# Altium PCB PCB1.PcbDoc
Units mm, origin at the board's own origin, x right, y up, seen from the top; angles counter-clockwise.
Board outline 45 x 65 mm, 2 copper layers (Top Layer, Bottom Layer); 70 components, 45 nets, 312 pads, 142 vias.
Unrouted connection lines stored in the file: 23.
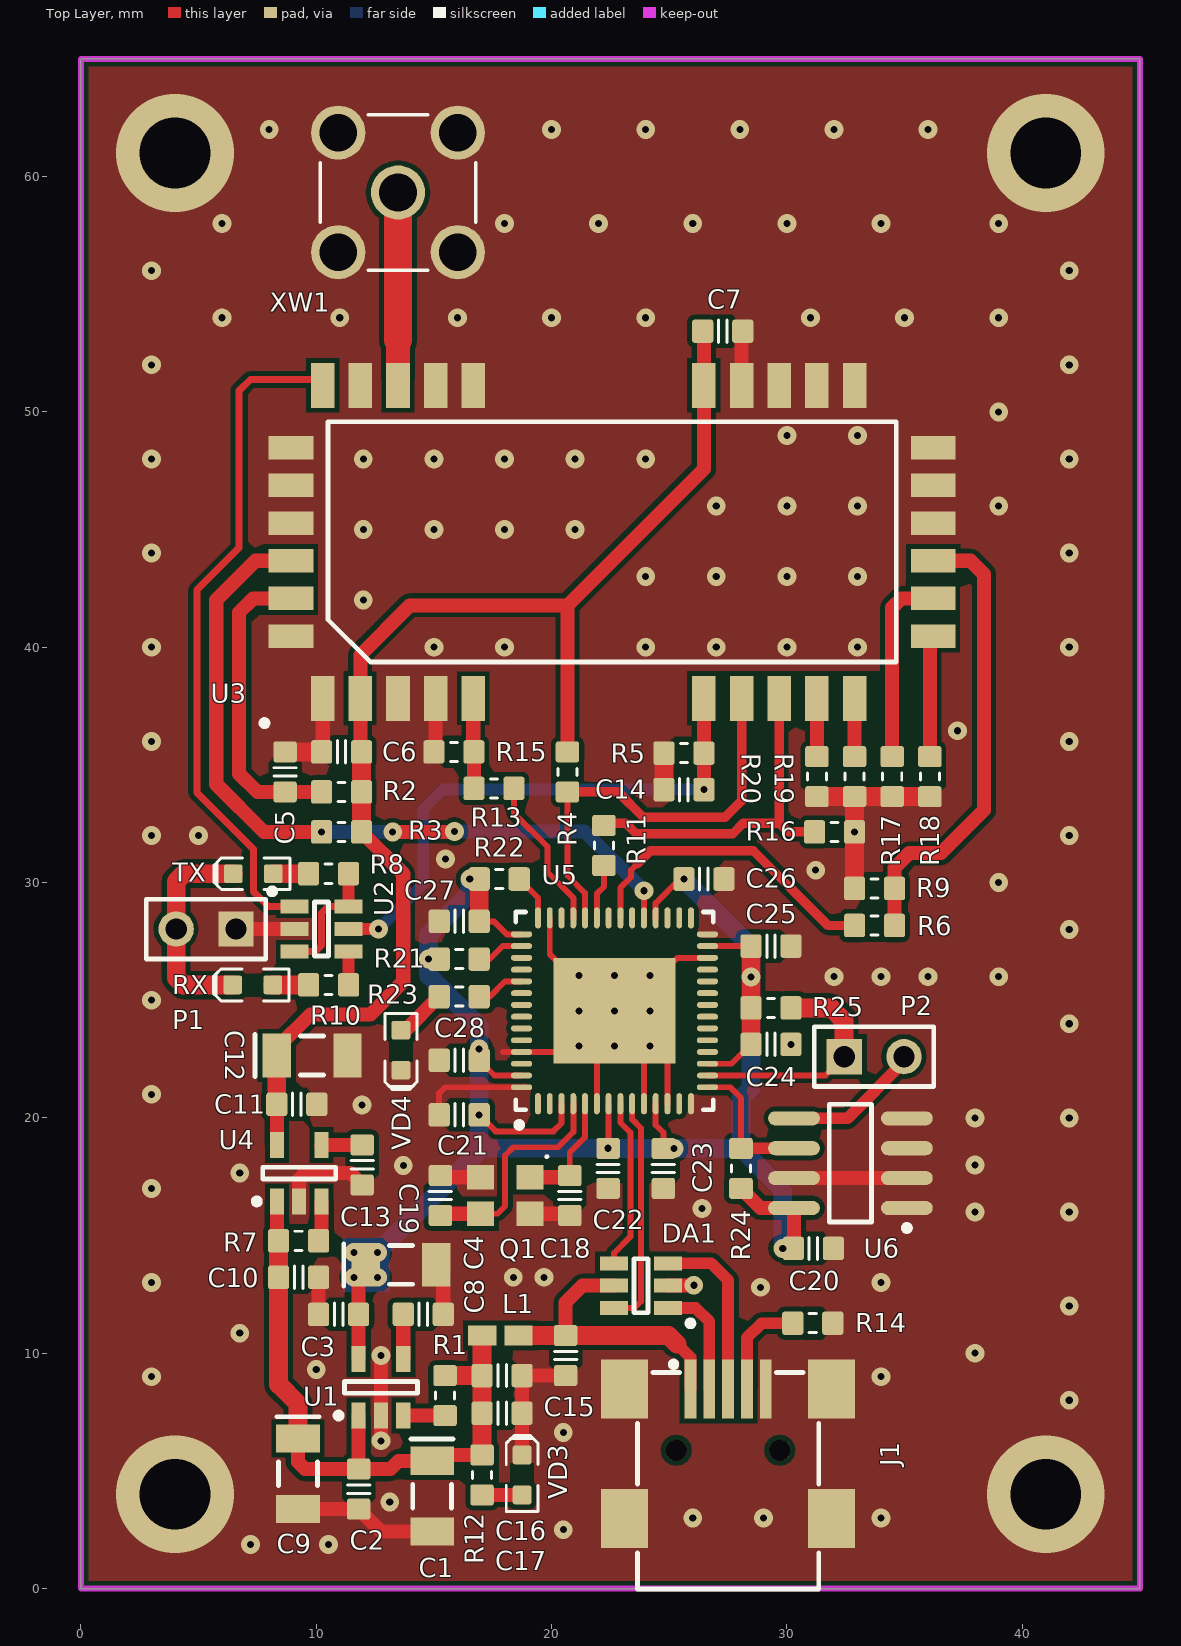
[diagram p0: Top Layer view]
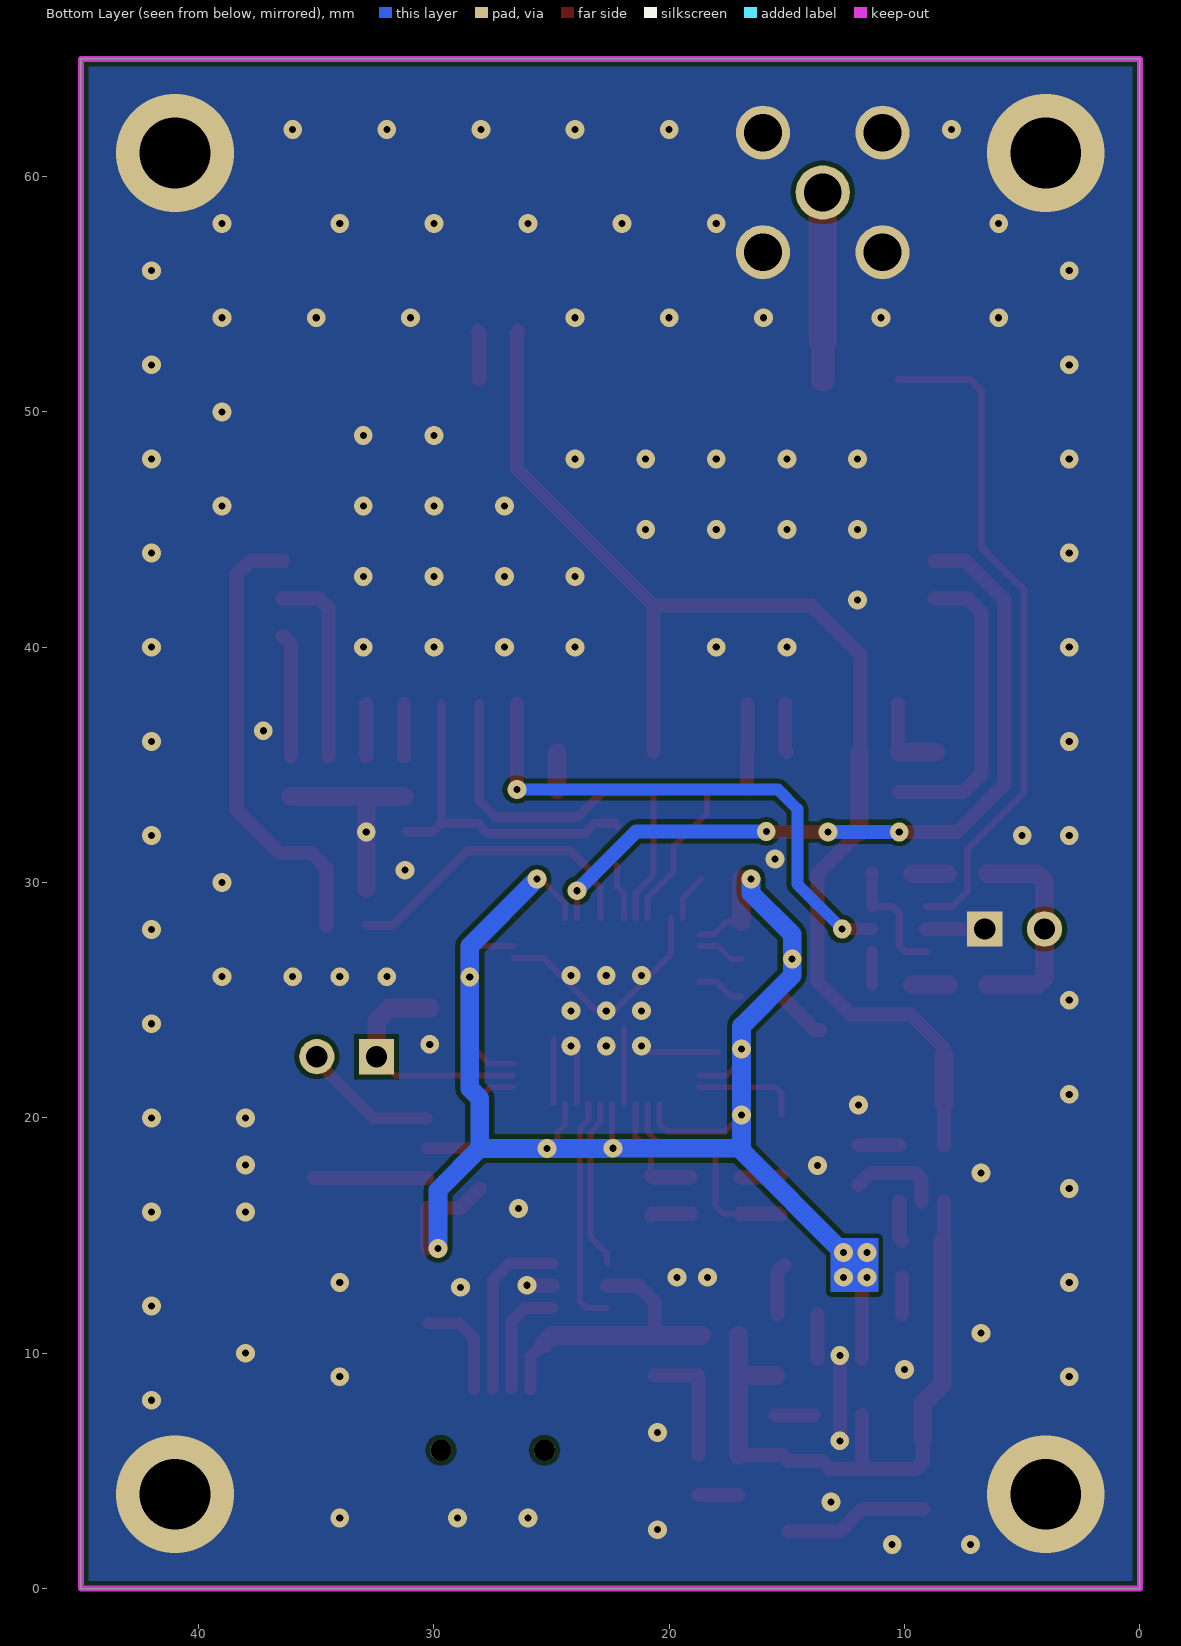
[diagram p1: Bottom Layer view, seen from below]

## Layer stack, top to bottom
Top Solder: solder mask 0.0102, Solder Resist, Dk 3.5
Top Layer: signal copper 0.0356
Dielectric 1: dielectric 0.32, FR-4, Dk 4.8
Bottom Layer: signal copper 0.0356
Bottom Solder: solder mask 0.0102, Solder Resist, Dk 3.5

## Board outline
0,0 45,0 45,65 0,65

## Design rules (kind name [scope] priority, off if disabled: settings)
Clearance [All] p1: gap=0.2 ignorepadtopadclearanceinfootprint=FALSE except(0: Arc-Hole Track-Hole SMDPad-Hole THPad-Hole Via-Hole Fill-Hole Poly-Hole Region-Hole Text-Hole)
PlaneConnect [All] p1: planeconnectstyle=Direct reliefexpansion=0.508 reliefentries=4 reliefconductorwidth=0.254 reliefairgap=0.254
PolygonConnect [All] p1: connectstyle=Direct reliefconductorwidth=0.254 reliefentries=4 polygonreliefangle="90 Angle" airgapwidth=0.254
RoutingVias [All] p1: holewidth=0.3 width=0.8 viastyle="Through Hole" minholewidth=0.3 minwidth=0.8 maxholewidth=10 maxwidth=12
SolderMaskExpansion [All] p1: expansion=0.102
Width [All] p1: maxlimit=3 minlimit=0.2 preferedwidth=0.5
29 further rules are at their usual default settings.

## Components (designator, comment, footprint, x,y, rotation, side; value= is the part's Value field where it differs from the comment)
C1 "10uF" CC3216(1206)x18 14.925,3.925 r270 top
C2 "0.1uF" CAP(0603) 11.8,4.225 r90 top
C3 "0.1uF" CAP(0603) 10.95,11.65 r0 top
C4 "22uF" CC3216(1206)x18 13.6,13.75 r0 top
C5 "1nF" CAP(0603) 8.675,34.7 r270 top
C6 "0.1uF" CAP(0603) 11.075,35.55 r0 top
C7 "0.1uF" CAP(0603) 27.275,53.425 r180 top
C8 "0.1uF" CAP(0603) 14.55,11.65 r180 top
C9 "10uF" CC3216(1206)x18 9.225,4.875 r270 top
C10 "0.1uF" CAP(0603) 9.25,13.225 r180 top
C11 "0.1uF" CAP(0603) 9.175,20.575 r180 top
C12 "22uF" CC3216(1206)x18 9.825,22.65 r0 top
C13 "0.1uF" CAP(0603) 11.95,18 r90 top
C14 "0.47uF" CAP(0603) 25.625,33.95 r180 top
C15 "0.01uF" CAP(0603) 20.6,9.9 r90 top
C16 "0.1uF" CAP(0603) 17.9,9.05 r180 top
C17 "4.7uF" CAP(0603) 17.9,7.45 r180 top
C18 "12pF" CAP(0603) 20.775,16.7 r90 top
C19 "12pF" CAP(0603) 15.275,16.7 r270 top
C20 "0.1uf" CAP(0603) 31.125,14.45 r180 top
C21 "0.1uF" CAP(0603) 16.075,20.125 r0 top
C22 "0.1uF" CAP(0603) 22.4,17.85 r90 top
C23 "0.1uF" CAP(0603) 24.75,17.85 r90 top
C24 "0.1uF" CAP(0603) 29.325,23.125 r180 top
C25 "0.1uF" CAP(0603) 29.325,27.3 r180 top
C26 "0.1uF" CAP(0603) 26.475,30.15 r180 top
C27 "0.1uF" CAP(0603) 16.075,28.35 r0 top
C28 "0.1uF" CAP(0603) 16.075,22.45 r0 top
DA1 "usblc6-2sc6" SOT23-6L 23.8,12.869 r180 top
J1 "USB 2.0 mini" 65100516121 27.5,4.6 r0 top
L1 "BLM18EG221SN1" BLM18EG221SN1 17.825,10.75 r180 top
P1 "Header 2" HDR1X2 6.59,28.025 r180 top
P2 "Header 2" HDR1X2 32.435,22.6 r0 top
Q1 "Crystal 24MHz" SMD3225 18.025,16.7 r180 top
R1 "10K" RES(0603) 15.475,8.2 r270 top
R2 "15K" RES(0603) 11.075,33.85 r0 top
R3 "100K" RES(0603) 11.075,32.15 r0 top
R4 "1K" RES(0603) 20.675,34.7 r90 top
R5 "100K" RES(0603) 25.625,35.5 r180 top
R6 "11K" RES(0603) 33.725,28.175 r0 top
R7 "10K" RES(0603) 9.25,14.775 r0 top
R8 "4.7K" RES(0603) 10.525,30.375 r180 top
R9 "36K" RES(0603) 33.725,29.75 r0 top
R10 "4.7K" RES(0603) 10.525,25.65 r180 top
R11 "1.1K" RES(0603) 22.225,31.575 r90 top
R12 "4.7K" RES(0603) 17.05,4.825 r90 top
R13 "1.1K" RES(0603) 17.55,34 r180 top
R14 "100K" RES(0603) 31.1,11.275 r180 top
R15 "3.6K" RES(0603) 15.85,35.55 r0 top
R16 "3.6K" RES(0603) 32.025,32.15 r180 top
R17 "100K" RES(0603) 34.475,34.5 r90 top
R18 "100K" RES(0603) 36.075,34.5 r90 top
R19 "100K" RES(0603) 32.875,34.5 r90 top
R20 "100K" RES(0603) 31.275,34.5 r90 top
R21 "10K" RES(0603) 16.075,26.75 r0 top
R22 "10K" RES(0603) 17.775,30.15 r180 top
R23 "4.7K" RES(0603) 16.075,25.15 r180 top
R24 "4.7K" RES(0603) 28.05,17.85 r270 top
R25 "4.7K" RES(0603) 29.325,24.675 r180 top
RX "VD_6" LED_0603 7.3,25.65 r180 top (schematic designator VD2)
TX "VD_6" LED_0603 7.325,30.375 r180 top (schematic designator VD1)
U1 "TPS73633DBVT" TI-DBV5_N 12.75,8.55 r90 top
U2 "SN74LVC2G04" SOT23-6L 10.225,28.025 r0 top
U3 "nanoPAN 5375" nanoPAN_fp 10.275,37.825 r0 top
U4 "TPS73625DBVT" TI-DBV5_N 9.275,17.65 r90 top
U5 "CY7C68013A-56LTXC" CYP-LTX56-5200X4500TP_N 22.675,24.55 r90 top
U6 "AT24C128" 8S1_N 32.7,18.075 r180 top
VD3 "VD_6" LED_0603 18.75,4.825 r90 top
VD4 "VD_6" LED_0603 13.6,22.875 r270 top
XW1 "XW_1" SMA-SV 13.475,59.325 r0 top

## Footprints (in the part's own frame and the unit in brackets; to place one, negate y for a bottom-side part, rotate by r counter-clockwise, add the part's x,y. Pads: shape width x height; smd on the part's side, far side on the other; paste and mask are expansions set on the pad)
8S1_N [mm] "SOIC, 8-Leads, Body 4.9x3.9mm, Pitch 1.27mm, IPC Medium Density"
  oval 2.2x0.6 smd: 1(-2.4,1.905) 2(-2.4,0.635) 3(-2.4,-0.635) 4(-2.4,-1.905) 5(2.4,-1.905) 6(2.4,-0.635) 7(2.4,0.635) 8(2.4,1.905)
  silkscreen extent -2.53,-2.5 0.9,2.88, body extent -3.1,-2.5 3.1,2.5, height 1.75
65100516121 [mm] "Mini USB 2.0 Type B SMT Horizontal 5 Contacts"
  rect 0.5x2.5 smd: 1(-1.6,3.875) 2(-0.8,3.875) 3(0,3.875) 4(0.8,3.875) 5(1.6,3.875)
  rect 2x2.5 smd: Shell(-4.4,-1.625) Shell(-4.4,3.875) Shell(4.4,-1.625) Shell(4.4,3.875)
  round 0.9 hole 0.9 unplated: ""(-2.2,1.275) ""(2.2,1.275)
  silkscreen extent -3.85,-4.62 3.85,5.04, body extent -4.8,-4.63 4.8,4.62, height 3.92
BLM18EG221SN1 [mm] "Molded Inductor, 2-Leads, Body 1,60x0,80mm, IPC Medium Density"
  rect 1.2x0.85 smd: 1(-0.775,0) 2(0.775,0)
  body extent -0.8,-0.4 0.8,0.4, height 0.8
CAP(0603) [mm]
  round 0.254 on Mech15: 0(0,0)
  rrect25% 0.9x1 smd: 1(-0.85,0) 2(0.85,0)
  Top Layer pour cut-out: -0.6,0.5 -0.4,0.7 0.4,0.7 0.6,0.5 0.6,-0.5 0.4,-0.7 -0.4,-0.7 -0.6,-0.5
  silkscreen extent -0.18,-0.48 0.18,0.48, body extent -0.9,-0.45 0.9,0.45, height 0.5
CC3216(1206)x18 [mm]
  rect 1.2x1.85 smd: 1(-1.5,0) 2(1.5,0)
  silkscreen extent -2.42,-0.9 0.5,0.9, body extent -1.7,-0.9 1.7,0.9, height 1.6
CYP-LTX56-5200X4500TP_N [mm] "QFN, 56-Leads, Body 8.1x8.1mm, Pitch 0.5mm, Thermal Pad 5.2x4.5mm, IPC Medium Density"
  oval 0.9x0.25 smd: 1(-3.95,3.25) 2(-3.95,2.75) 3(-3.95,2.25) 4(-3.95,1.75) 5(-3.95,1.25) 6(-3.95,0.75) 7(-3.95,0.25) 8(-3.95,-0.25) 9(-3.95,-0.75) 10(-3.95,-1.25) 11(-3.95,-1.75) 12(-3.95,-2.25) 13(-3.95,-2.75) 14(-3.95,-3.25) 29(3.95,-3.25) 30(3.95,-2.75) 31(3.95,-2.25) 32(3.95,-1.75) 33(3.95,-1.25) 34(3.95,-0.75) 35(3.95,-0.25) 36(3.95,0.25) 37(3.95,0.75) 38(3.95,1.25) 39(3.95,1.75) 40(3.95,2.25) 41(3.95,2.75) 42(3.95,3.25)
  oval 0.25x0.9 smd: 15(-3.25,-3.95) 16(-2.75,-3.95) 17(-2.25,-3.95) 18(-1.75,-3.95) 19(-1.25,-3.95) 20(-0.75,-3.95) 21(-0.25,-3.95) 22(0.25,-3.95) 23(0.75,-3.95) 24(1.25,-3.95) 25(1.75,-3.95) 26(2.25,-3.95) 27(2.75,-3.95) 28(3.25,-3.95) 43(3.25,3.95) 44(2.75,3.95) 45(2.25,3.95) 46(1.75,3.95) 47(1.25,3.95) 48(0.75,3.95) 49(0.25,3.95) 50(-0.25,3.95) 51(-0.75,3.95) 52(-1.25,3.95) 53(-1.75,3.95) 54(-2.25,3.95) 55(-2.75,3.95) 56(-3.25,3.95)
  rect 4.5x5.2 smd: 57(0,0)
  silkscreen extent -4.97,-4.2 4.2,4.2, body extent -4,-4 4,4, height 0.95
HDR1X2 [mm] "Connector; Header; 2 Position"
  rect 1.5x1.5 hole 0.9: 1(0,0)
  round 1.5 hole 0.9: 2(2.54,0)
  silkscreen extent -1.27,-1.27 3.81,1.27
LED_0603 [mm] "Molded Diode, 2-Leads, Body 1,60x0,80mm, IPC Medium Density"
  round 0.254 on Mech15: 0(0,0)
  rrect25% 0.8x0.8 smd: A(-0.85,0) K(0.85,0)
  Top Layer pour cut-out: -0.5,0.5 0.5,0.5 0.5,-0.5 -0.5,-0.5
  silkscreen extent -1.55,-0.67 1.68,0.67, body extent -0.8,-0.4 0.8,0.4, height 0.75
nanoPAN_fp [mm]
  rect 1x1.9 smd: 1(0,0) 2(1.6,0) 3(3.2,0) 4(4.8,0) 5(6.4,0) 6(16.2,0) 7(17.8,0) 8(19.4,0) 9(21,0) 10(22.6,0) 17(22.6,13.3) 18(21,13.3) 19(19.4,13.3) 20(17.8,13.3) 21(16.2,13.3) 22(6.4,13.3) 23(4.8,13.3) 24(3.2,13.3) 25(1.6,13.3) 26(0,13.3)
  rect 1.9x1 smd: 11(25.95,2.65) 12(25.95,4.25) 13(25.95,5.85) 14(25.95,7.45) 15(25.95,9.05) 16(25.95,10.65) 27(-1.35,10.65) 28(-1.35,9.05) 29(-1.35,7.45) 30(-1.35,5.85) 31(-1.35,4.25) 32(-1.35,2.65)
  silkscreen extent -2.6,-1.17 24.38,11.75, body extent -2.22,-0.85 26.82,14.15, height 3
RES(0603) [mm] "Res 0603"
  round 0.254 on Mech15: 0(0,0)
  rrect25% 0.9x1 smd: 1(-0.85,0) 2(0.85,0)
  Top Layer pour cut-out: -0.6,0.5 -0.4,0.7 0.4,0.7 0.6,0.5 0.6,-0.5 0.4,-0.7 -0.4,-0.7 -0.6,-0.5
  silkscreen extent -0.15,-0.41 0.15,0.41, body extent -0.9,-0.47 0.9,0.48, height 0.5
SMA-SV [mm]
  round 2.3 hole 1.6: 1(0,0) 2(-2.54,-2.54) 2(-2.54,2.54) 2(2.54,-2.54) 2(2.54,2.54)
  silkscreen extent -3.3,-3.3 3.3,3.3, body extent -3.17,-3.17 3.17,3.17, height 9.5
SMD3225 [mm] "DFN, 4-Leads, Body 2,50x3,20mm, Pitch 2,10mm, IPC Medium Density"
  rect 1.15x1.05 smd: 1(-1.05,-0.775) 2(1.05,-0.775) 3(1.05,0.775) 4(-1.05,0.775)
  silkscreen extent -1.83,-1.7 -1.73,-1.6, body extent -1.6,-1.25 1.6,1.25, height 0.61
SOT23-6L [mm] "SOT23-6L"
  rect 1.2x0.6 smd: 1(-1.15,0.95) 2(-1.15,0) 3(-1.15,-0.95) 4(1.15,-0.95) 5(1.15,0) 6(1.15,0.95)
  silkscreen extent -2.23,-1.15 0.3,1.72, body extent -1.51,-1.53 1.49,1.52, height 1.4
TI-DBV5_N [mm] "SOT23, 5-Leads, Body 2.9x1.6mm, Pitch 0.95mm, IPC Medium Density"
  rect 1.1x0.6 smd: 1(-1.2,0.95) 2(-1.2,0) 3(-1.2,-0.95) 4(1.2,-0.95) 5(1.2,0.95)
  silkscreen extent -1.32,-1.55 0.25,1.92, body extent -0.87,-1.52 0.87,1.53, height 1.45

## Part data
C1 C4 C9 C12: library part Tantalum, "Tantalum SMD capacitor"
C2 C3 C5 C6 C7 C8 C10 C11 C13 C14 C15 C16 C17 C18 C19 C20 C21 C22 C23 C24 C25 C26 C27 C28: library part CAP
J1: "Mini USB 2.0 Type B SMT Horizontal 5 Contacts WR-COM"
L1: "SMD Ferrite Bead 2A 220 Ohm(100MHz)", Current="2 A", DC Resistance="0.05 Ohm", Impedance="220 Ohm (100MHz) / 260 Ohm (1GHz)", Name="Чип-феррит BLM18EG221SN1", Ta=-55+125, Type=Inductor, Vendor1="Murata Manufacturing, Co., Japan", Vendor1Name=BLM18EG221SN1
P1 P2: "Header, 2-Pin", LatestRevisionDate=17-Jul-2002, LatestRevisionNote="Re-released for DXP Platform.", Publisher="Altium Limited"
R1 R2 R3 R4 R5 R6 R7 R8 R9 R10 R11 R12 R13 R14 R15 R16 R17 R18 R19 R20 R21 R22 R23 R24 R25: library part RES, "Chip Resistor"
U1: "Single Output Low Noise LDO, 400 mA, Fixed 3.3 V Output, 1.7 to 5.5 V Input, with Reverse Current Protection, 5-pin SOT-23 (DBV), -40 to 85 degC, Green (RoHS & no Sb/Br)", Manufacturer="Texas Instruments", Rating=Catalog, Accuracy(%)=1, Code_JEDEC=MO-178, DatasheetVersion=SBVS038T, Eco-Plan="Green (RoHS & no Sb/Br)", Fixed Output Options(V)=3.3, Iout(Max)(A)=0.4, Iq(Typ)(mA)=0.3, Mounting Technology="Surface Mount", PackageDescription="5-Pin Plastic Small Outline, Body 1.60 × 2.90 mm, Pitch 0.95 mm", PackageReference=DBV5, PackageVersion=4073253-4/K, PartNumber=TPS73633DBVT, SubFamily="Single Channel LDO", Vdo(Typ)(mV)=75, Vin(Max)(V)=5.5, Vin(Min)(V)=1.7, Vout Adj(Max)(V)=3.3, Vout Adj(Min)(V)=3.3
U2: library part SN74LVC2G04DBVR
U3: library part nanoPAN
U4: "Single Output Low Noise LDO, 400 mA, Fixed 2.5 V Output, 1.7 to 5.5 V Input, with Reverse Current Protection, 5-pin SOT-23 (DBV), -40 to 85 degC, Green (RoHS & no Sb/Br)", Manufacturer="Texas Instruments", Rating=Catalog, Accuracy(%)=1, Code_JEDEC=MO-178, DatasheetVersion=SBVS038T, Eco-Plan="Green (RoHS & no Sb/Br)", Fixed Output Options(V)=2.5, Iout(Max)(A)=0.4, Iq(Typ)(mA)=0.3, Mounting Technology="Surface Mount", PackageDescription="5-Pin Plastic Small Outline, Body 1.60 × 2.90 mm, Pitch 0.95 mm", PackageReference=DBV5, PackageVersion=4073253-4/K, PartNumber=TPS73625DBVT, SubFamily="Single Channel LDO", Vdo(Typ)(mV)=75, Vin(Max)(V)=5.5, Vin(Min)(V)=1.7, Vout Adj(Max)(V)=2.5, Vout Adj(Min)(V)=2.5
U5: "EZ-USB(R) FX2LP(TM) USB Microcontroller High-Speed USB Peripheral Controller, 16 KB, 24 I/Os, 3 to 3.6 V, 0 to 70 degC, 56-Pin QFN (LTX56), Tray"

## Via types
v1: diameter 0.8, hole 0.3, Top Layer to Bottom Layer, tented both sides, 113 vias
v2: diameter 0.8, hole 0.3, Top Layer to Bottom Layer, tented bottom, 25 vias
v3: diameter 5, hole 3, Top Layer to Bottom Layer, 4 vias

## Nets (pads, with @x,y where several pads share a name; then routed paths per layer and width w, separated by ;. In a path a pad name is that pad's centre, name@x,y a point inside that pad or via, vN(x,y) a via of type N, cw(c..) or ccw(c..) an arc to the next point about the centre after c; other vN are vias at no path point)
2V5: C6.2 C7.2 C11.2 C12.1 R2.2 R3.2 R4.2 U3.2 U3.21 U4.5 | length 55.3
  Top Layer w0.6: U4.5 C11.2 ; C12.1 8.325,22.975 9.75,24.4 12.3,24.4 13.7,25.8 13.7,30.375 R3.2 ; C6.2@11.9,35.55 11.875,35.575 11.875,37.575 11.875,39.675 13.975,41.775 20.675,41.775 ; R4.2 20.675,41.775 ; C7.2 26.475,53.375 26.475,51.375 26.475,47.575 20.675,41.775
  Top Layer w0.8: C11.2 C12.1 ; R3.2 R2.2 C6.2
3V3: C3.2 C4.1 C20.2 C21.2 C22.2 C23.2 C24.2 C25.2 C26.2 C27.2 C28.2 R21.1 R22.2 R24.2 R25.2 U1.5 U5.3 U5.7 U5.11 U5.17 U5.27 U5.32 U5.43 U5.55 U6.8 | length 81.8
  Top Layer w0.25: v2(16.925,20.125) 17.625,19.425 20.075,19.425 20.425,19.775 U5.3 ; C28.2 17.575,21.8 U5.55 ; C27.2 17.55,28.35 18.1,27.8 U5.43 ; C22.2 22.425,18.725 U5.7 ; U5.11 24.425,19.7 24.75,19.375 C23.2 ; U5.32 24.425,29.125 25.45,30.15 v2(25.625,30.15) ; U5.17 27.65,22.3 C24.2 ; U5.27 C25.2
  Top Layer w0.6: U1.5 C3.2 11.8,13.45 C4.1 ; R24.2 28.88,16.17 U6.8 30.3,14.475 C20.2
  Top Layer w0.8: C27.2 R22.2 ; C24.2 R25.2 v1(28.475,25.987) C25.2
  Bottom Layer w0.8: v2(12.6,14.275) 16.925,18.6 ; v2(16.525,30.15) 16.525,29.55 14.775,27.8 v2(14.775,26.75) 14.775,26.05 16.925,23.9 v2(16.925,22.925) v2(16.925,20.125) 16.925,18.6 ; v2(25.625,30.15) 28.475,27.3 v1(28.475,25.987) 28.475,21.25 28.05,20.825 28.05,18.7 ; v2(29.825,14.45) 29.825,16.925 28.05,18.7 ; 16.925,18.6 17.032,18.707 v2(22.392,18.707) 22.4,18.7 v2(25.2,18.7) 28.05,18.7
  other v2: 11.6,13.225 12.6,13.225 11.6,14.275
5V: C1.1 C2.2 C9.1 C10.2 C16.2 C17.2 L1.2 R1.1 R7.1 R12.2 U1.1 U4.1 | length 28.6
  Top Layer w0.6: U4.1 8.325,14.85 R7.1 ; C9.1 9.225,5.375 9.525,5.075 C2.2 ; U1.1 C2.2 ; R12.2 15.175,5.675 C1.1 13.5,5.425 13.15,5.075 C2.2
  Top Layer w0.8: R7.1 C10.2 8.4,8.675 9.225,7.85 C9.1 ; R1.1 C16.2 ; R12.2 C17.2 C16.2 ; L1.2 C16.2
/PONRESET: R6.1 U5.35 | length 13.4
  Top Layer w0.25: U5.35 22.925,29.775 23.375,30.225 23.375,30.525 23.65,30.8
  Top Layer w0.4: 23.65,30.8 24.2,31.35 28.575,31.35 31.75,28.175 R6.1
ANT: U3.24 XW1.1 | length 8
  Top Layer w1: U3.24@13.475,51.375 13.475,53.05
  Top Layer w1.2: 13.475,53.05 XW1.1
AT_SCL: R24.1 U5.15 U6.6 | length 6
  Top Layer w0.25: U5.15 27.6,21.3 28.05,20.85 R24.1
  Top Layer w0.5: R24.1 28.06,18.71 U6.6
AT_SDA: P2.1 R25.1 U5.16 | length 10.1
  Top Layer w0.25: U5.16 31.635,21.8 P2.1
  Top Layer w0.8: R25.1 31.875,24.675 32.425,24.125 32.425,22.61 P2.1
D+_P: DA1.3 J1.3 | length 7.5
  Top Layer w0.5: DA1.3 26.781,13.819 27.5,13.1 J1.3
D-_N: DA1.1 J1.2 | length 4.9
  Top Layer w0.5: DA1.1 26.131,11.919 26.7,11.35 J1.2
DMINUS: DA1.6 U5.9 | length 9.8
  Top Layer w0.25: DA1.6 23.522,11.919 23.8,12.197 23.8,14.248 23.8,19.561 23.425,19.936 U5.9
DPLUS: DA1.4 U5.8 | length 7.2
  Top Layer w0.25: DA1.4 22.65,14.25 23.35,14.95 23.35,19.375 22.925,19.8 U5.8
GND: C1.2 C2.1 C3.1 C4.2 C5.1 C6.1 C7.1 C8.1 C9.2 C10.1 C11.1 C12.2 C13.1 C14.2 C15.1 C16.1 C17.1 C18.1 C19.1 C20.1 C21.1 C22.1 C23.1 C24.1 C25.1 C26.1 C27.1 C28.1 DA1.2 J1.5 J1.Shell P1.1 Q1.2 Q1.4 R5.2 R9.1 R14.1 R15.1 R16.1 R17.1 R18.1 R19.1 R20.1 U1.2 U2.2 U3.1 U3.3 U3.4 U3.14 U3.15 U3.16 U3.17 U3.18 U3.19 U3.20 U3.22 U3.23 U3.25 U3.27 U3.28 U3.29 U3.32 U4.2 U5.6 U5.10 U5.12 U5.14 U5.26 U5.28 U5.41 U5.53 U5.56 U5.57 U6.1 U6.2 U6.3 U6.4 U6.7 VD3.K VD4.K XW1.2 | length 78.1
  Top Layer w0.25: C21.1 15.225,21.05 15.475,21.3 U5.56 ; 17.925,22.8 U5.53 U5.57@20.925,22.8 ; U5.41 19.925,26.95 U5.57@22.325,24.55 ; U5.6 U5.57@21.925,23.8 ; U5.57@23.1,24.55 25.35,26.8 U5.26 ; U5.10 U5.57@23.925,23.3 ; U5.12 U5.57@24.925,23.375
  Top Layer w0.6: P1.1 U2.2 ; C9.2 C2.1 12.75,2.425 C1.2 ; U4.2 9.275,17.4 9.525,17.65 11.45,17.65 C13.1 ; C3.1 C10.1 ; C6.1@10.2,35.55 10.275,35.625 U3.1@10.275,37.575 ; v1(12.75,6.275) U1.2 ; U1.2 v1(12.75,9.9) ; R15.1 15.075,35.625 U3.4@15.075,37.575 ; C4.2 15.4,13.45 C8.1 ; C19.1 15.35,17.475 Q1.2 ; VD3.K C17.1 C16.1 C15.1 ; Q1.4 20.7,15.925 C18.1 ; DA1.2 26.027,12.869 v1(26.045,12.887) ; U3.20@28.075,51.375 28.075,53.375 C7.1 ; U6.7 U6.2
  Top Layer w0.8: C5.1 10.2,35.55 C6.1 ; C14.2 R5.2 ; R20.1 R19.1 ; R9.1 v2(32.875,32.15) R19.1 ; R18.1 R17.1 R19.1
  other v1: 7.2,1.875 10.525,1.875 20.5,2.5 26,3 29,3 34,3 13.125,3.675 20.5,6.625 42,8 3,9 34,9 10,9.3 38,10 6.75,10.85 42,12 28.875,12.8 3,13 34,13 18.375,13.225 19.675,13.225 38,16 42,16 26.4,16.15 3,17 6.75,17.65 13.7,17.975 38,18 38,20 42,20 11.95,20.55 3,21 42,24 3,25 32,26 34,26 36,26 39,26 42,28 39,30 31.225,30.525 15.5,31 3,32 5,32 42,32 3,36 42,36 37.25,36.45 3,40 15,40 18,40 24,40 27,40 30,40 33,40 42,40 12,42 24,43 27,43 30,43 33,43 3,44 42,44 12,45 15,45 18,45 21,45 27,46 30,46 33,46 39,46 3,48 12,48 15,48 18,48 21,48 24,48 42,48 30,49 33,49 39,50 3,52 42,52 6,54 11,54 16,54 20,54 24,54 31,54 35,54 39,54 3,56 42,56 6,58 18,58 22,58 26,58 30,58 34,58 39,58 8,62 20,62 24,62 28,62 32,62 36,62
  other v2: 21.175,23.05 22.675,23.05 24.175,23.05 30.175,23.125 21.175,24.55 22.675,24.55 24.175,24.55 21.175,26.05 22.675,26.05 24.175,26.05
  other v3: 4,4 41,4 4,61 41,61
LED_RX: R10.1 U2.4 | length 1.4
  Top Layer w0.5: R10.1 U2.4
LED_TX: R8.1 U2.3 U2.6 | length 5.3
  Top Layer w0.3: U2.3 9.975,27.075 10.225,27.325 10.225,28.7 10.5,28.975 U2.6
  Top Layer w0.5: U2.6 R8.1
NetC8_2: C8.2 U1.4 | length 1.9
  Top Layer w0.6: U1.4 C8.2
NetC13_2: C13.2 U4.4 | length 1.7
  Top Layer w0.6: U4.4 C13.2
NetJ1_4: J1.4 R14.2 | length 4.4
  Top Layer w0.5: J1.4 28.3,10.65 28.925,11.275 R14.2
NetP1_2: P1.2 RX.K TX.K | length 9.2
  Top Layer w0.8: RX.K 4.35,25.65 4.05,25.95 P1.2 4.05,30.05 4.375,30.375 TX.K
NetP2_2: P2.2 U6.5 | length 5.9
  Top Layer w0.5: U6.5 32.58,19.98 34.975,22.375 P2.2
NetR1_2: R1.2 U1.3 | length 1.6
  Top Layer w0.6: U1.3@13.85,7.35 R1.2
NetR6_2: R6.2 R9.2 U3.13 | length 19.5
  Top Layer w0.6: R6.2 R9.2 34.575,30.625 35.2,31.25 36.55,31.25 38.375,33.075 38.375,43.1 37.8,43.675 U3.13@36.425,43.675
NetR7_2: R7.2 U4.3 | length 1.7
  Top Layer w0.6: R7.2 10.225,14.9 U4.3
NetR8_2: R8.2 TX.A | length 1.5
  Top Layer w0.8: TX.A R8.2
NetR10_2: R10.2 RX.A | length 1.5
  Top Layer w0.8: RX.A R10.2
NetR11_2: R11.2 R16.2 U3.8 | length 14.6
  Top Layer w0.4: R11.2 22.325,32.525 23.15,32.525 23.6,32.075 27.7,32.075 28.15,32.525 29.675,32.525 ; U3.8@29.675,37.575 29.675,32.525 ; R16.2 30.05,32.15 29.675,32.525
NetR12_1: R12.1 VD3.A | length 1.7
  Top Layer w0.6: R12.1 VD3.A
NetR13_2: R13.2 R15.2 U3.5 | length 3.6
  Top Layer w0.6: U3.5@16.675,37.575 16.675,35.575 R15.2 R13.2
NetR17_2: R17.2 U3.12 | length 8.4
  Top Layer w0.6: R17.2 34.475,41.675 34.875,42.075 U3.12@36.425,42.075
NetR18_2: R18.2 U3.11 | length 5.3
  Top Layer w0.6: R18.2 36.075,40.125 U3.11@36.425,40.475
NetR19_2: R19.2 U3.10 | length 2.2
  Top Layer w0.6: R19.2 U3.10@32.875,37.575
NetR20_2: R20.2 U3.9 | length 2.2
  Top Layer w0.6: R20.2 U3.9@31.275,37.575
NetR21_2: R21.2 U5.44 | length 2
  Top Layer w0.25: R21.2 17.375,26.75 17.925,27.3 U5.44
NetR22_1: R22.1 U5.42 | length 2
  Top Layer w0.25: R22.1 19.425,29.35 U5.42
NetR23_1: R23.1 U5.47 | length 2.1
  Top Layer w0.25: R23.1 17.375,25.15 18.025,25.8 U5.47
NetR23_2: R23.2 VD4.A | length 2.2
  Top Layer w0.6: VD4.A 13.8,23.725 R23.2
QX1: C18.2 Q1.1 U5.5 | length 5.1
  Top Layer w0.25: C18.2 20.775,18.525 21.425,19.175 U5.5
  Top Layer w0.6: Q1.1 20.7,17.475 C18.2
QX2: C19.2 Q1.3 U5.4 | length 9.6
  Top Layer w0.25: Q1.3 17.7,15.925 18.025,16.25 18.025,18.4 18.375,18.75 20.275,18.75 20.925,19.4 U5.4
  Top Layer w0.6: C19.2 15.35,15.925 Q1.3
SPI_CLK: R13.1 U5.39 | length 6.5
  Top Layer w0.25: R13.1 18.4,32.95 19.825,31.525 19.825,30.45 20.925,29.35 U5.39
SPI_MISO: R4.1 U3.7 U5.38 | length 17.9
  Top Layer w0.25: R4.1 20.675,30.3 21.425,29.55 U5.38
  Top Layer w0.4: R4.1 22.825,33.85 23.9,32.775 27.375,32.775 28.075,33.475 U3.7@28.075,37.575
SPI_MOSI: R11.1 U5.37 | length 2.3
  Top Layer w0.25: U5.37 21.925,29.525 22.225,29.825 R11.1
TX_/RX: U2.1 U3.26 | length 28.8
  Top Layer w0.3: U2.1 7.975,28.975 7.325,29.625 7.325,31.425 4.925,33.825 4.925,42.425 6.725,44.225 6.725,50.9 7.2,51.375 U3.26@10.275,51.375
UCIRQ: R3.1 U3.30 U5.33 | length 32.7
  Top Layer w0.25: U5.33 v1(23.925,29.65)
  Top Layer w0.6: U3.30@8.725,43.675 7.425,43.675 5.75,42 5.75,34.175 7.775,32.15 v2(10.225,32.15) ; v1(13.25,32.15) 15.85,32.15 v1(15.875,32.175)
  Bottom Layer w0.6: v2(10.225,32.15) v1(13.25,32.15) ; v1(15.875,32.175) 21.4,32.175 v1(23.925,29.65)
UCRESET: C5.2 R2.1 U3.31 | length 12.9
  Top Layer w0.6: U3.31@8.725,42.075 7.325,42.075 6.725,41.475 6.725,34.625 7.5,33.85 C5.2 R2.1
UCVCC: C14.1 R5.1 U2.5 U3.6 | length 23.1
  Top Layer w0.5: U2.5 v1(12.65,28.025)
  Top Layer w0.6: v2(26.475,33.95) R5.1 U3.6@26.475,37.575
  Bottom Layer w0.5: v1(12.65,28.025) 14.55,29.925 14.55,33.125 15.375,33.95 v2(26.475,33.95)
Vbus: C15.2 DA1.5 J1.1 L1.1 | length 12.8
  Top Layer w0.5: L1.1@18.6,10.775 L1.1@18.625,10.75 ; 25.337,10.387 25.9,9.825 J1.1
  Top Layer w0.6: C15.2 20.6,12.15 21.319,12.869 DA1.5
  Top Layer w0.8: L1.1@18.625,10.75 C15.2 24.975,10.75 25.337,10.387
pads on no net: C2.0 C3.0 C5.0 C6.0 C7.0 C8.0 C10.0 C11.0 C13.0 C14.0 C15.0 C16.0 C17.0 C18.0 C19.0 C20.0 C21.0 C22.0 C23.0 C24.0 C25.0 C26.0 C27.0 C28.0 J1. R1.0 R2.0 R3.0 R4.0 R5.0 R6.0 R7.0 R8.0 R9.0 R10.0 R11.0 R12.0 R13.0 R14.0 R15.0 R16.0 R17.0 R18.0 R19.0 R20.0 R21.0 R22.0 R23.0 R24.0 R25.0 RX.0 TX.0 U5.1 U5.2 U5.13 U5.18 U5.19 U5.20 U5.21 U5.22 U5.23 U5.24 U5.25 U5.29 U5.30 U5.31 U5.34 U5.36 U5.40 U5.45 U5.46 U5.48 U5.49 U5.50 U5.51 U5.52 U5.54 VD3.0 VD4.0

## Polygon pours and split planes (outlines as drawn)
GND on Bottom Layer "GND_L02_P002" (solid, pour order 2): 0.3,0.3 44.7,0.3 44.7,64.7 0.3,64.7
GND on Top Layer "GND_L01_P000" (solid, pour order 0): 0.3,0.3 44.7,0.3 44.7,64.7 0.3,64.7

## Keep-outs
Keep-Out Layer:
  the board outline again, w0.254

## Other copper
Top Layer:
  pour cut-out: 19.25,27.975 19.25,21.15 26.1,21.15 26.1,27.975
Bottom Layer:
  region net 3V3: 11.125,12.6 13.125,12.6 13.125,14.875 11.125,14.875

## Silkscreen, mask and mechanical layers (free items; w line width, h text height)
Mechanical 1:
  the board outline again, w0.2